# Altium PCB STM32_PCB1.PcbDoc
Units mm, origin at the board's own origin, x right, y up, seen from the top; angles counter-clockwise.
Board outline 41 x 41.1 mm, 4 copper layers (L1(Signal), L2(GND), L3(GND), L4(Signal)), stack 1.57 mm thick; 35 components, 27 nets, 172 pads, 67 vias.
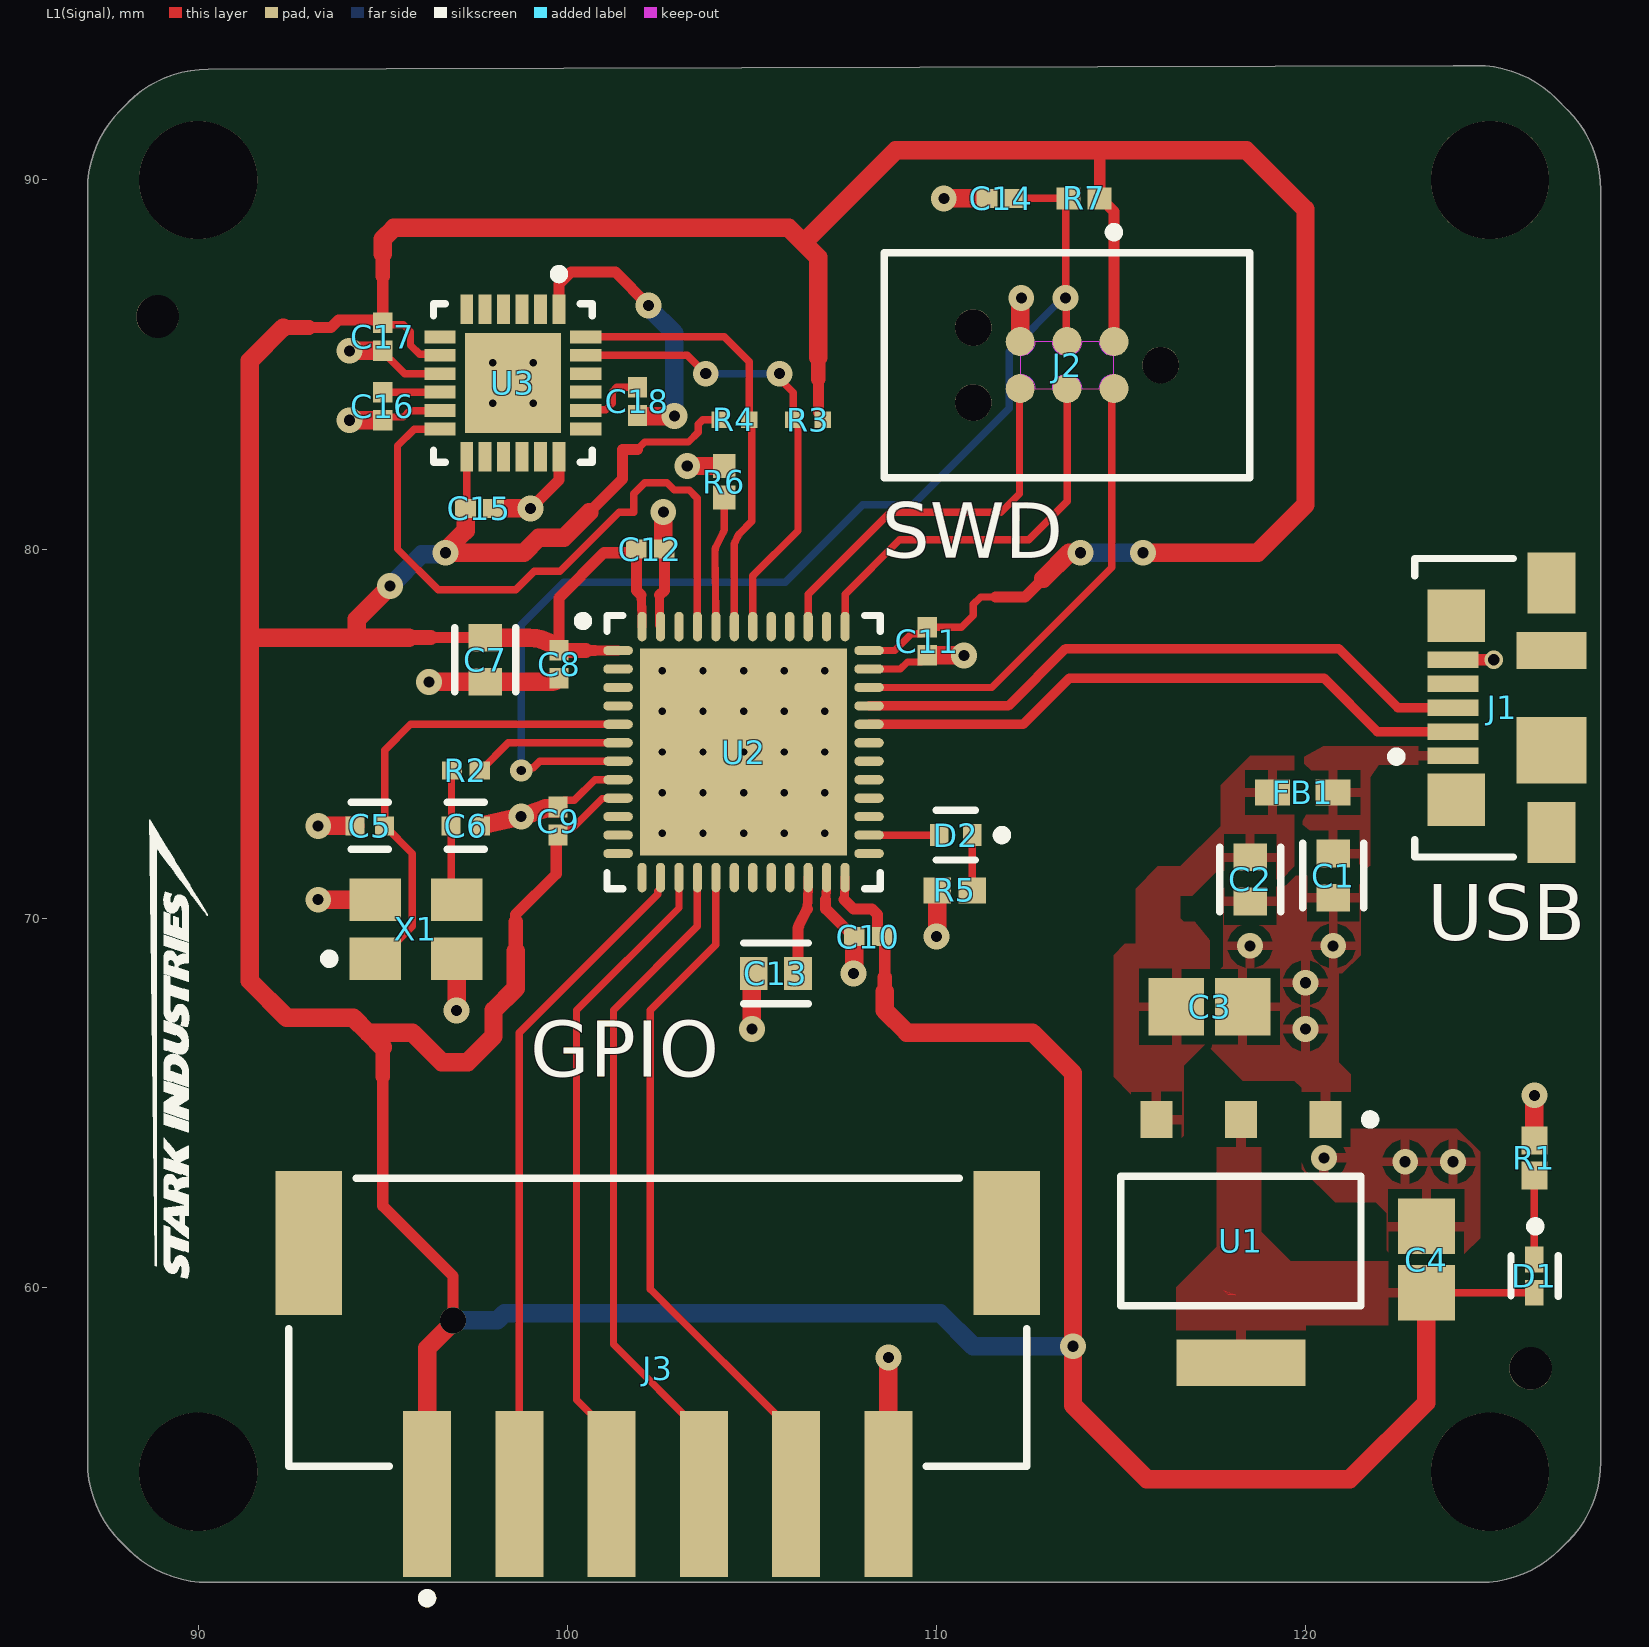
[diagram p0: L1(Signal) view]
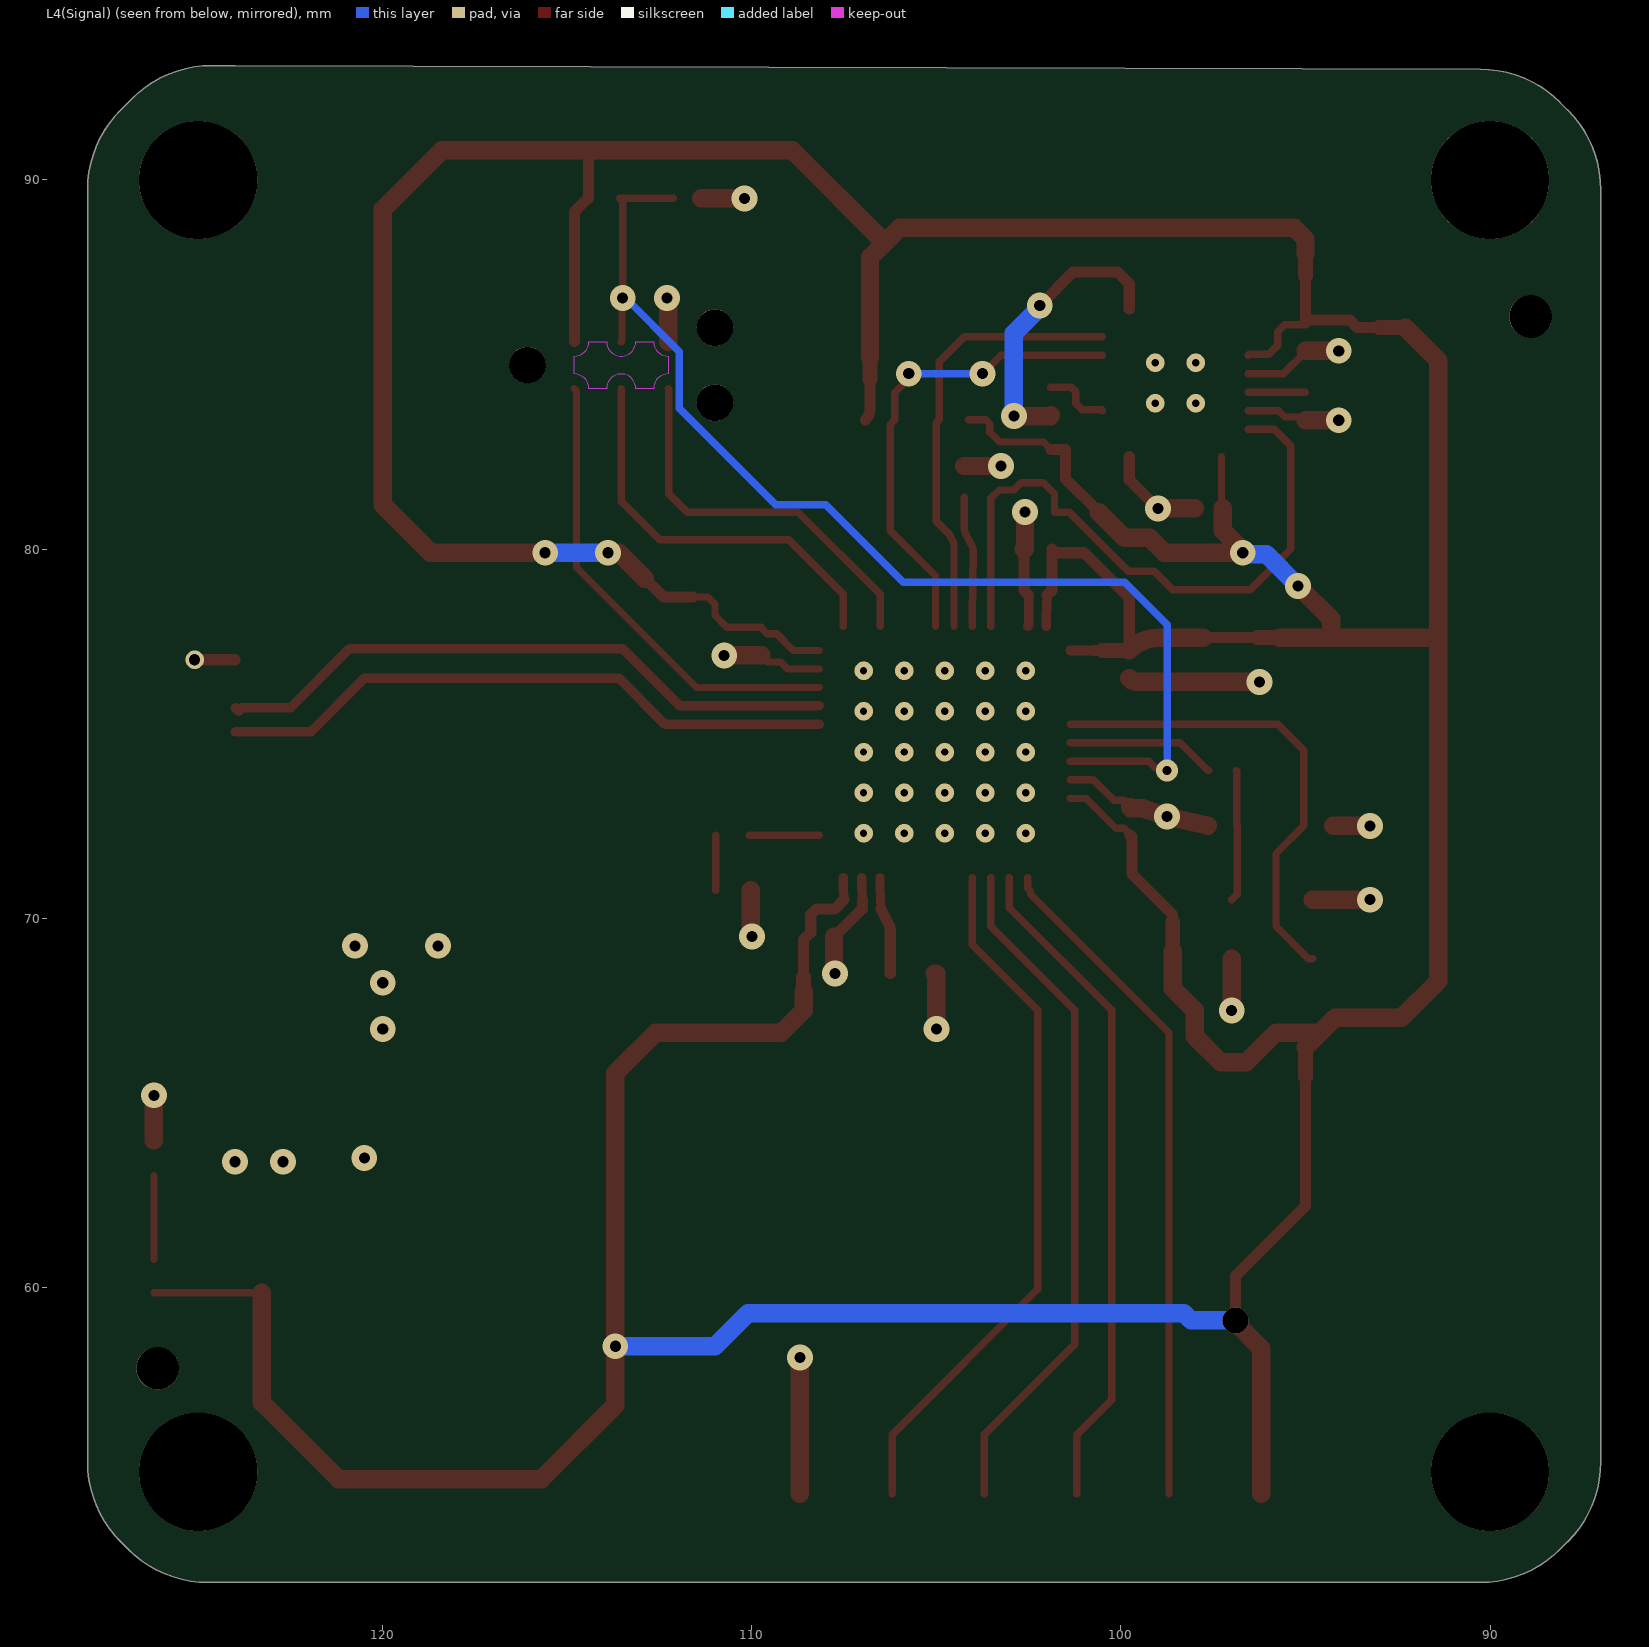
[diagram p1: L4(Signal) view, seen from below]
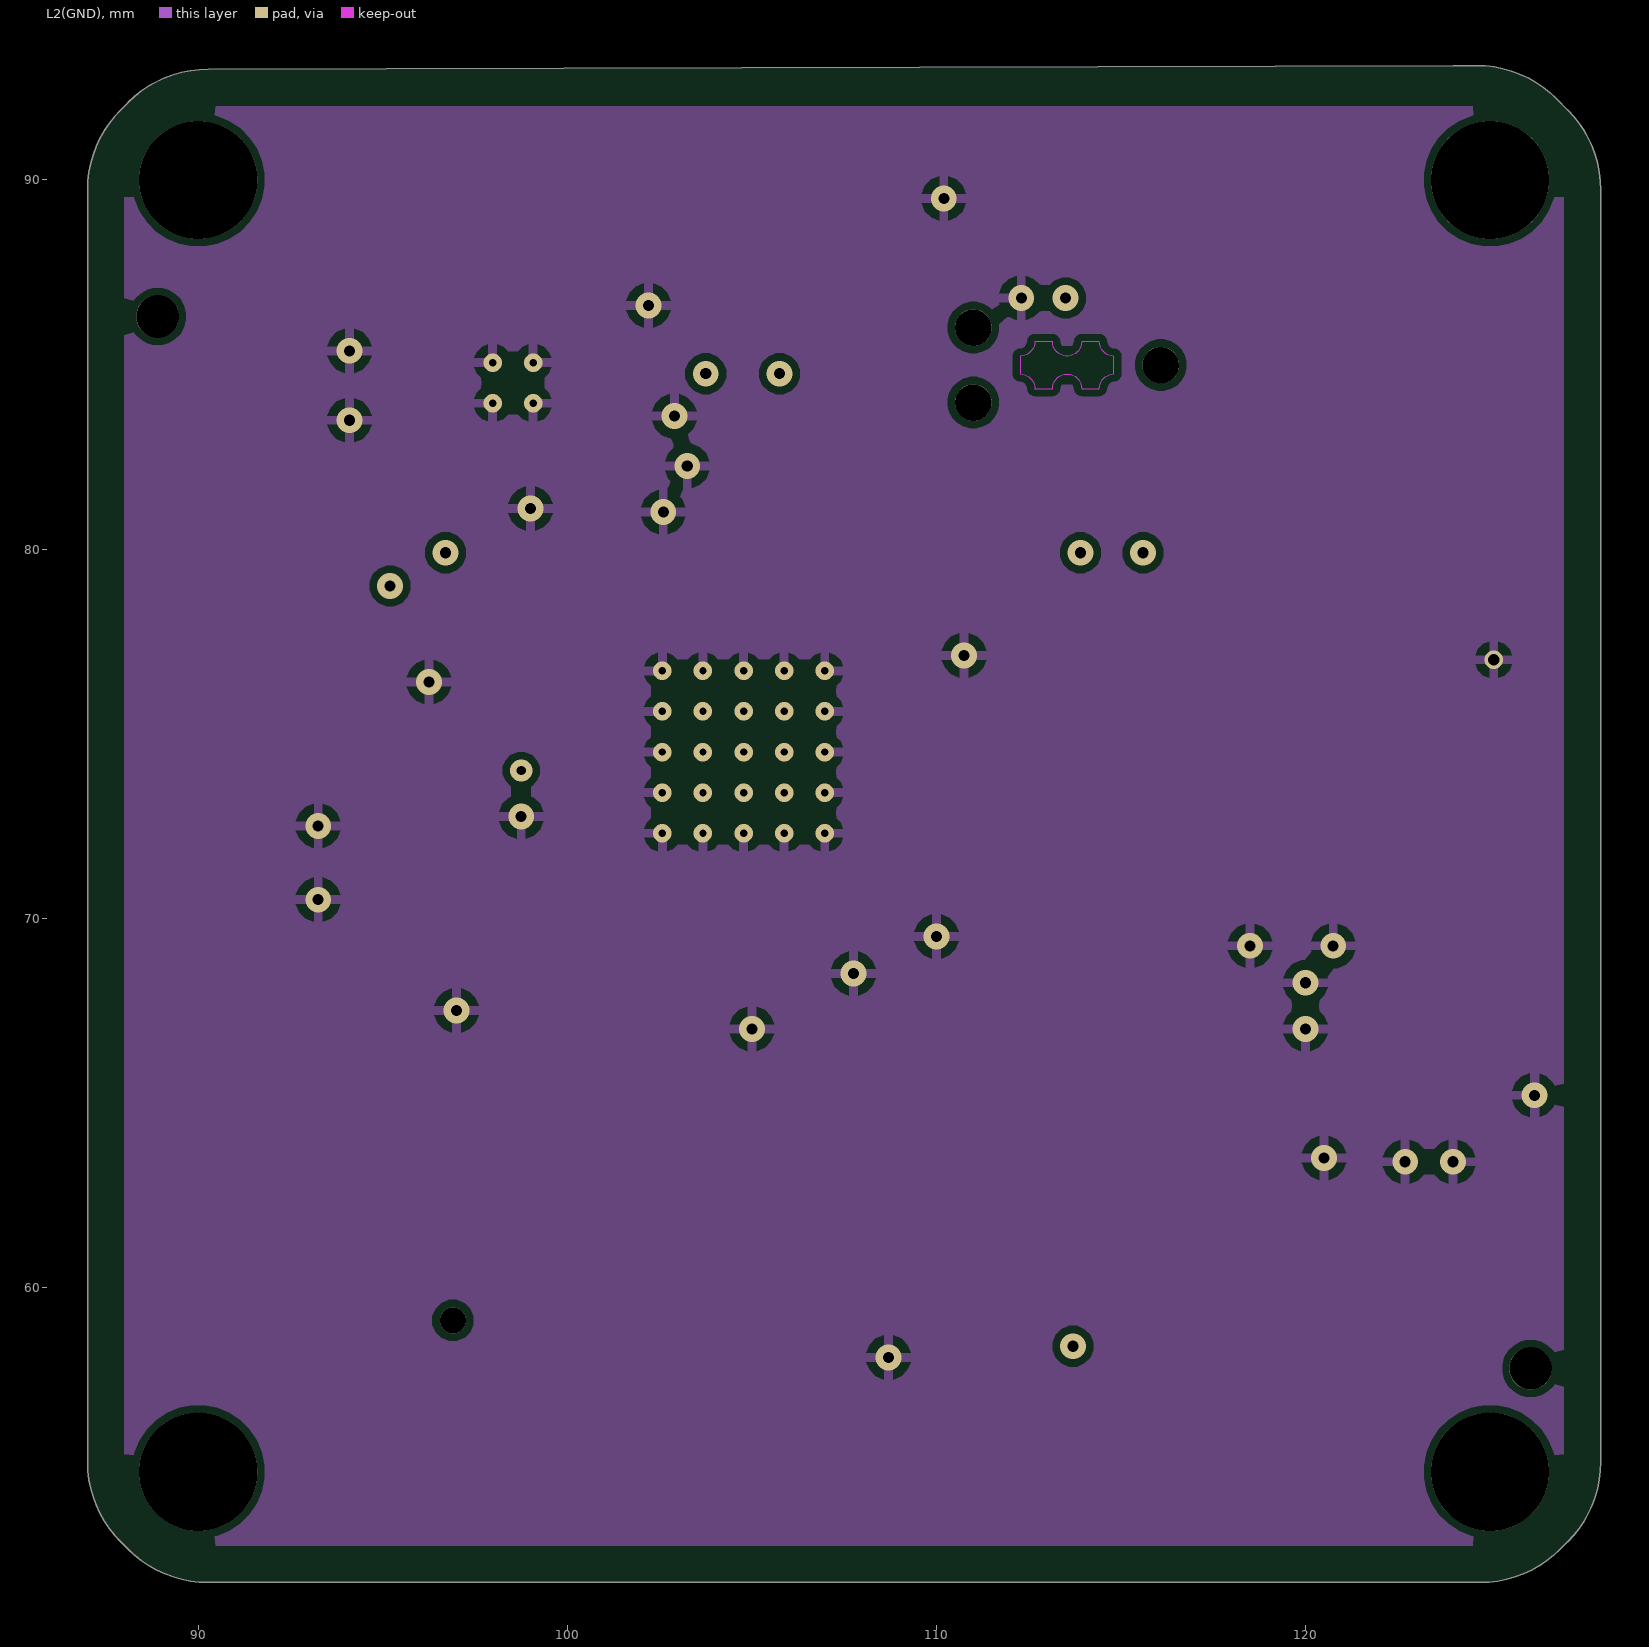
[diagram p2: L2(GND)]
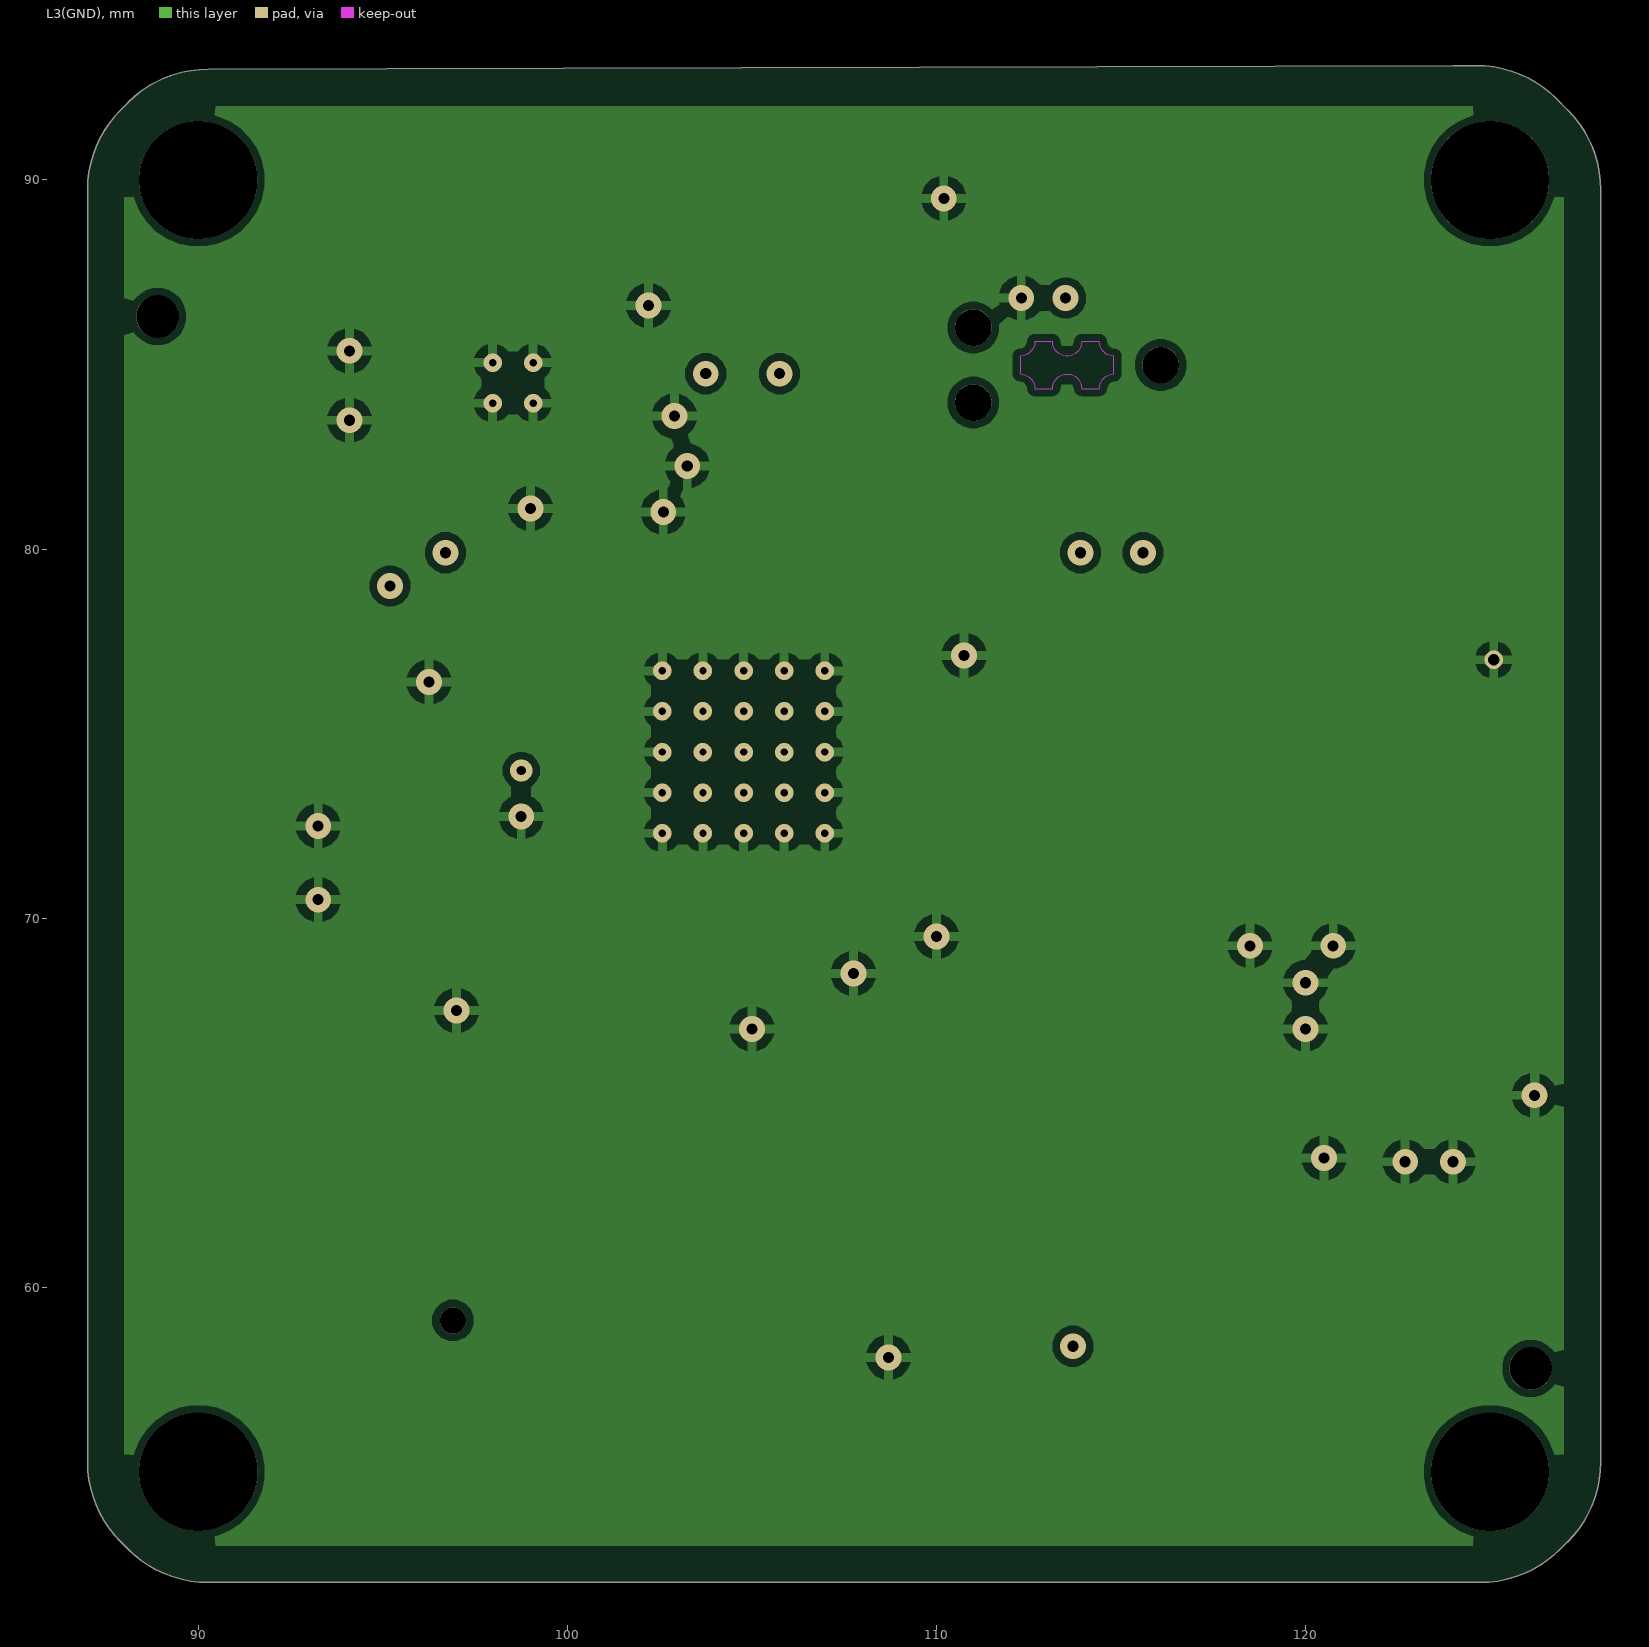
[diagram p3: L3(GND)]

## Layer stack, top to bottom
Top Solder: solder mask 0.0254, SM-001, Dk 4
L1(Signal): signal copper 0.035
Dielectric 1: prepreg 0.2, PP-017, Dk 4.6
L2(GND): signal copper 0.0175
Dielectric 3: core 1.065, Core-039, Dk 4.6
L3(GND): signal copper 0.0175
Dielectric 5: prepreg 0.2, PP-017, Dk 4.6
L4(Signal): signal copper 0.035
Bottom Solder: solder mask 0.0254, SM-001, Dk 4

## Board outline
87.898,53.102 cw(c90.066,55.27) 87,55.27 87,56 87,88 87,89.73 cw(c90.066,89.73) 87.898,91.898 88.102,92.102 cw(c90.27,89.934) 90.27,93 124,93.1 124.63,93.1 cw(c124.63,90.034) 126.798,92.202 127.102,91.898 cw(c124.934,89.73) 128,89.73 128,55.27 cw(c124.934,55.27) 127.102,53.102 126.898,52.898 cw(c124.73,55.066) 124.73,52 90.27,52 cw(c90.27,55.066) 88.102,52.898

## Design rules (kind name [scope] priority, off if disabled: settings)
Clearance [All] p1: gap=0.2 ignorepadtopadclearanceinfootprint=FALSE
DiffPairsRouting [All] p1: maxlimit=0.254 minlimit=0.203 mostfreqgap=0.254 toplayer_maxgap=0.203 toplayer_prefgap=0.203 toplayer_minwidth=0.26 toplayer_maxwidth=0.26 toplayer_prefwidth=0.26 bottomlayer_maxgap=0.203 bottomlayer_prefgap=0.203 bottomlayer_minwidth=0.26 bottomlayer_maxwidth=0.26 bottomlayer_prefwidth=0.26 impedanceprofiledriven=TRUE impedanceprofileid={B0877188-79C3-4CE7-93F6-CE359E386961} impedanceprofilevalue=90.000000 maxuncoupledlength=12.7
PolygonConnect [All] p1: connectstyle=Relief reliefconductorwidth=0.254 reliefentries=4 polygonreliefangle="90 Angle" airgapwidth=0.254
RoutingVias [All] p1: holewidth=0.3 width=0.7 viastyle="Through Hole" minholewidth=0.25 minwidth=0.55 maxholewidth=0.4 maxwidth=0.9
SolderMaskExpansion [All] p1: expansion=0.102 istentingtop=FALSE
SupplyNets "Schematic Supply Nets_3" [InNet('+5V')] p1: voltage=0.000
SupplyNets "Schematic Supply Nets_2" [InNet('VBUS')] p2: voltage=0.000
SupplyNets "Schematic Supply Nets_1" [InNet('GND')] p3: voltage=0.000
SupplyNets "Schematic Supply Nets" [InNet('+3.3V')] p4: voltage=0.000
Width [All] p1: maxlimit=1 minlimit=0.2 preferedwidth=0.3 midlayer1_minwidth=0.254 midlayer1_maxwidth=0.254 midlayer1_prefwidth=0.254 midlayer2_minwidth=0.254 midlayer2_maxwidth=0.254 midlayer2_prefwidth=0.254 minimp=50.000000 maximp=50.000000 favimp=50.000000
29 further rules are at their usual default settings.

## Classes and differential pairs
differential pair class DIFF_USB: USB_D
differential pair USB_D: +USB_D_P -USB_D_N

## Components (designator, comment, footprint, x,y, rotation, side; value= is the part's Value field where it differs from the comment)
C1 "2.2u" FP-C0603C225K4PACTU-MFG 120.75,71.15 r270 top
C2 "2.2u" FP-C0603C225K4PACTU-MFG 118.5,71.05 r270 top
C3 "22u" CAPC2013X140X50ML20T25 117.4,67.6 r180 top
C4 "22u" CAPC2013X140X50ML20T25 123.275,60.75 r270 top
C5 "10p" FP-C0402-BB-MFG 94.65,72.5 r180 top value="10 pF"
C6 "10p" FP-C0402-BB-MFG 97.25,72.5 r0 top value="10 pF"
C7 "2.2u" FP-C0603C225K4PACTU-MFG 97.775,77 r270 top
C8 "100n" CAPC1005X55X30LL05T10 99.775,76.88 r90 top
C9 "100n" CAPC1005X55X30LL05T10 99.75,72.63 r270 top
C10 "100n" CAPC1005X55X30LL05T10 108.155,69.5 r0 top
C11 "100n" CAPC1005X55X30LL05T10 109.75,77.5 r90 top
C12 "100n" CAPC1005X55X30LL05T10 102.25,80 r180 top
C13 "2.2u" FP-C0603C225K4PACTU-MFG 105.65,68.5 r180 top
C14 "100n" CAPC1005X55X30LL05T10 111.75,89.5 r0 top
C15 "100n" CAPC1005X55X30LL05T10 97.62,81.1 r180 top
C16 "100n" CAPC1005X55X30LL05T10 95,83.87 r90 top
C17 "10n" CAPC1005X55X30LL05T10 95,85.75 r90 top
C18 "2n2" CAPC1005X55X30LL05T10 101.9,84 r90 top
D1 "LED_GREEN" FP-APHHS1005CGCK-MFG 126.2,60.3 r270 top
D2 "RED" FP-SML-P11UTT86-MFG 110.525,72.25 r180 top
FB1 "742792625" WE-CBF_0603_L1.6W0.8H0.8_HC 119.925,73.4 r180 top
J1 "473460001" FP-473460001-MFG 126.31,75.7 r90 top
J2 "TC2030-CTX-NL" FP-TC2030-CTX-NL-MFG 113.54,84.984 r180 top
J3 "S6B-XH-SM4-TB(LF)(SN)" FP-S6B-XH-SM4-TB_LF_SN-MFG 102.45,59.05 r180 top
R1 "1k" RESC1005X40X25ML10T10 126.2,63.5 r270 top
R2 "0R" RESC1005X40X25LL10T10 97.25,74 r0 top
R3 "2.2k" RESC1005X40X25LL05T05 106.525,83.5 r0 top
R4 "2.2k" RESC1005X40X25LL05T05 104.525,83.5 r180 top
R5 "1k" RESC1005X40X25ML10T10 110.5,70.75 r0 top
R6 "10k" RESC1005X40X25NL10T10 104.25,81.825 r270 top
R7 "10k" RESC1005X40X25NL10T10 114,89.5 r0 top
U1 "AMS1117-3.3" FP-AMS1117-IPC_C 118.25,61.25 r270 top
U2 "STM32F411CEU6" STM-UFQFPN48_L 104.775,74.5 r0 top
U3 "MPU-6050" IS-QFN-24_V 98.525,84.5 r270 top
X1 "24Mhz" EPSON-TSX-3225_V 95.9,69.7 r0 top

## Footprints (in the part's own frame and the unit in brackets; to place one, negate y for a bottom-side part, rotate by r counter-clockwise, add the part's x,y. Pads: shape width x height; smd on the part's side, far side on the other; paste and mask are expansions set on the pad)
CAPC1005X55X30LL05T10 [mm] "Chip Capacitor, 2-Leads, Body 1.00x0.50mm, IPC High Density"
  rect 0.56x0.52 smd: 1(-0.38,0) 2(0.38,0)
  body extent -0.53,-0.28 0.53,0.28, height 0.55
CAPC2013X140X50ML20T25 [mm] "Chip Capacitor, 2-Leads, Body 2.00x1.25mm, IPC Low Density"
  rect 1.5x1.55 smd: 1(-0.9,0) 2(0.9,0)
  body extent -1.1,-0.72 1.1,0.72, height 1.4
EPSON-TSX-3225_V [mm] "SMD, 4-Leads, Body 3.2x2.5mm"
  rect 1.4x1.15 smd: 1(-1.1,-0.8) 2(1.1,-0.8) 3(1.1,0.8) 4(-1.1,0.8)
  silkscreen extent -2.47,-0.92 -2.22,-0.68, body extent -1.6,-1.25 1.6,1.25, height 0.6
FP-473460001-MFG [mm]
  rect 0.45x1.38 smd paste+0 mask+0: 1(-1.3,2.31) 2(-0.65,2.31) 3(0,2.31) 4(0.65,2.31) 5(1.3,2.31)
  rect 1.425x1.55 smd paste+0 mask+0: 6(-2.488,2.225) 7(2.488,2.225)
  rect 1.65x1.3 smd paste+0 mask+0: 8(-3.375,-0.35) 11(3.375,-0.35)
  rect 1.8x1.9 smd paste+0 mask+0: 9(-1.15,-0.35)
  rect 1x1.9 smd paste+0 mask+0: 10(1.55,-0.35)
  silkscreen extent -4.05,0.67 4.05,3.97, body extent -4.3,-2.48 4.3,3.45, height 0.25
FP-AMS1117-IPC_C [mm]
  rect 1.004x0.872 smd paste+0 mask+0: 1(-3.295,2.29) 2(-3.295,0) 3(-3.295,-2.29)
  rect 1.25x3.5 smd paste+0 mask+0: 4(3.295,0)
  silkscreen extent -3.42,-3.25 1.75,3.63, body extent -3.9,-3.35 3.9,3.35, height 0.25
FP-APHHS1005CGCK-MFG [mm]
  rect 0.7x0.5 smd paste+0 mask+0: 1(-0.45,0) 2(0.45,0)
  silkscreen extent -1.47,-0.63 0.55,0.65, body extent -0.9,-0.4 0.9,0.4, height 0.25
FP-C0402-BB-MFG [mm]
  rect 0.52x0.52 smd paste+0 mask+0: 1(-0.4,0) 2(0.4,0)
  silkscreen extent -0.5,-0.64 0.5,0.64, body extent -0.8,-0.4 0.8,0.4, height 0.25
FP-C0603C225K4PACTU-MFG [mm]
  rect 0.75x0.9 smd paste+0 mask+0: 1(-0.6,0) 2(0.6,0)
  silkscreen extent -0.87,-0.82 0.87,0.82, body extent -1.2,-0.6 1.2,0.6, height 0.25
FP-S6B-XH-SM4-TB_LF_SN-MFG [mm]
  rect 1.3x4.5 smd paste+0 mask+0: 1(6.25,4.65) 2(3.75,4.65) 3(1.25,4.65) 4(-1.25,4.65) 5(-3.75,4.65) 6(-6.25,4.65)
  rect 1.8x3.9 smd paste+0 mask+0: 7(-9.45,-2.15) 8(9.45,-2.15)
  silkscreen extent -10,-3.9 10,7.6, body extent -9.97,-6.1 9.97,3.9, height 6
FP-SML-P11UTT86-MFG [mm]
  rect 0.5x0.6 smd paste+0 mask+0: 1(-0.45,0) 2(0.45,0)
  silkscreen extent -1.38,-0.67 0.53,0.67, body extent -0.8,-0.43 0.8,0.43, height 0.25
FP-TC2030-CTX-NL-MFG [mil]
  round 30.98 smd paste-39370.1 mask+0: 1(-50,-25) 2(-50,25) 3(0,-25) 4(0,25) 5(50,-25) 6(50,25)
  round 39.02 hole 39.02 unplated paste-99999 mask+0: ""(-100,0) ""(100,-40) ""(100,40)
  Keep-Out Layer region: -34.51,-25 -15.49,-25 -13.96,-18.28 -9.66,-12.89 -3.45,-9.9 3.45,-9.9 9.66,-12.89 13.96,-18.28 15.49,-25 15.49,-25 34.51,-25 35.69,-19.07 39.05,-14.05 44.07,-10.69 50,-9.51 50,-9.51 50,9.51 44.07,10.69 39.05,14.05 35.69,19.07 34.51,25 34.51,25 15.49,25 13.96,18.28 9.66,12.89 3.45,9.9 -3.45,9.9 -9.66,12.89 -13.96,18.28 -15.49,25 -15.49,25 -34.51,25 -35.69,19.07 -39.05,14.05 -44.07,10.69 -50,9.51 -50,9.51 -50,-9.51 -44.07,-10.69 -39.05,-14.05 -35.69,-19.07 -34.51,-25
  silkscreen extent -195,-147 195,120, body extent -199,-124 199,124, height 10
IS-QFN-24_V [mm] "QFN, 24-Leads, Body 4x4mm, Pitch 0.5mm, Thermal Pad 2.7x2.6mm"
  rect 0.8x0.35 smd: 1(-2,1.25) 2(-2,0.75) 3(-2,0.25) 4(-2,-0.25) 5(-2,-0.75) 6(-2,-1.25) 13(2,-1.25) 14(2,-0.75) 15(2,-0.25) 16(2,0.25) 17(2,0.75) 18(2,1.25)
  rect 0.35x0.85 smd mask+0.102: 7(-1.25,-1.975) 8(-0.75,-1.975) 9(-0.25,-1.975) 10(0.25,-1.975) 11(0.75,-1.975) 12(1.25,-1.975) 19(1.25,1.975) 20(0.75,1.975) 21(0.25,1.975) 22(-0.25,1.975) 23(-0.75,1.975) 24(-1.25,1.975)
  rect 2.7x2.6 smd: 25(0,0)
  silkscreen extent -3.07,-2.15 2.15,2.15, body extent -2,-2 2,2, height 0.95
RESC1005X40X25LL05T05 [mm] "Chip Resistor, 2-Leads, Body 1.00x0.50mm, IPC High Density"
  rect 0.45x0.45 smd: 1(-0.4,0) 2(0.4,0)
  body extent -0.53,-0.27 0.53,0.28, height 0.4
RESC1005X40X25LL10T10 [mm] "Chip Resistor, 2-Leads, Body 1.00x0.50mm, IPC High Density"
  rect 0.55x0.5 smd: 1(-0.375,0) 2(0.375,0)
  body extent -0.55,-0.3 0.55,0.3, height 0.4
RESC1005X40X25ML10T10 [mm] "Chip Resistor, 2-Leads, Body 1.00x0.50mm, IPC Low Density"
  rect 0.75x0.7 smd: 1(-0.475,0) 2(0.475,0)
  body extent -0.55,-0.3 0.55,0.3, height 0.4
RESC1005X40X25NL10T10 [mm] "Chip Resistor, 2-Leads, Body 1.00x0.50mm, IPC Medium Density"
  rect 0.65x0.6 smd: 1(-0.425,0) 2(0.425,0)
  body extent -0.55,-0.3 0.55,0.3, height 0.4
STM-UFQFPN48_L [mm] "QFN, 48-Leads, Body 7.1x7.1mm, Pitch 0.5mm, Thermal Pad 5.6x5.6mm, IPC High Density"
  oval 0.8x0.25 smd: 1(-3.4,2.75) 2(-3.4,2.25) 3(-3.4,1.75) 4(-3.4,1.25) 5(-3.4,0.75) 6(-3.4,0.25) 7(-3.4,-0.25) 8(-3.4,-0.75) 9(-3.4,-1.25) 10(-3.4,-1.75) 11(-3.4,-2.25) 12(-3.4,-2.75) 25(3.4,-2.75) 26(3.4,-2.25) 27(3.4,-1.75) 28(3.4,-1.25) 29(3.4,-0.75) 30(3.4,-0.25) 31(3.4,0.25) 32(3.4,0.75) 33(3.4,1.25) 34(3.4,1.75) 35(3.4,2.25) 36(3.4,2.75)
  oval 0.25x0.8 smd: 13(-2.75,-3.4) 14(-2.25,-3.4) 15(-1.75,-3.4) 16(-1.25,-3.4) 17(-0.75,-3.4) 18(-0.25,-3.4) 19(0.25,-3.4) 20(0.75,-3.4) 21(1.25,-3.4) 22(1.75,-3.4) 23(2.25,-3.4) 24(2.75,-3.4) 37(2.75,3.4) 38(2.25,3.4) 39(1.75,3.4) 40(1.25,3.4) 41(0.75,3.4) 42(0.25,3.4) 43(-0.25,3.4) 44(-0.75,3.4) 45(-1.25,3.4) 46(-1.75,3.4) 47(-2.25,3.4) 48(-2.75,3.4)
  rect 5.6x5.6 smd: 49(0,0)
  silkscreen extent -4.47,-3.7 3.7,3.7, body extent -3.55,-3.55 3.55,3.55, height 0.6
WE-CBF_0603_L1.6W0.8H0.8_HC [mm] "SMD EMI Suppression Ferrite  Bead, body 1.60x0.80mm"
  rect 0.95x0.7 smd: 1(-0.825,0) 2(0.825,0)
  body extent -0.8,-0.4 0.8,0.4, height 0.8

## Part data
C1 C2 C7 C13: library part CMP-2006-02259-2, "CAP CER 2.2UF 16V X5R 0603", Capacitance=2.2uF, Case Code (Imperial)=0603, Case Code (Metric)=1608, Dielectric=X5R, Dielectric Material=Ceramic, Max Operating Temperature=85°C, Min Operating Temperature=-55°C, Package Quantity=1, Tolerance=10%, Voltage=16V, Case/Package=0603, Construction=Flat, Contact Plating=Tin, Depth=0.8mm, Dissipation Factor=5%, Height=0.8mm, Lead Free="Lead Free", Length=1.6mm, Mount="Surface Mount", Number of Pins=2, Packaging="Tape and Reel", Radiation Hardening=No, REACH SVHC="No SVHC", RoHS Compliant=Yes, Series=C, Termination=SMD/SMT, Thickness=0.034inch, Voltage Rating=16V, Voltage Rating (DC)=16V, Width=0.8mm
C3 C4: library part CMP-2007-03313-1, Manufacturer=Kemet, Part Number=C0805X225K4RACTU
C5 C6: library part CMP-2008-03443-2, "CAP CER 10PF 16V 10% NP0 0402", Capacitance="10 pF", Manufacturer=Kemet, Manufacturer Part Number=C0402C100K4GACTU, Package=C0402-BB, Temperature="-55°C to +125°C", Temperature Characteristic=C0G, Temperature Coefficient=15%, Temperature Range High=+125°C, Temperature Range Low=-55°C, Tolerance=0.1, Voltage Rating="16 V", Automotive=No, Category=Cap, ComponentLink2Description=Datasheet, ComponentLink2URL=https://content.kemet.com/datasheets/KEM_C1002_X7R_SMD.pdf, Device Class L1="Passive Components", Device Class L2=Capacitors, Device Class L3="Ceramic Capacitors", Digikey Description="CAP CER 10PF 16V 10% NP0 0402", Height=0.55mm, Ipc Land Pattern Name=CAPC10050X50, Lead Free=Yes, Material=Ceramic, Mouser Description="Multilayer Ceramic Capacitors MLCC - SMD/SMT 16volts 10pF C0G 10%", Octopart=https://octopart.com/c0402c100k4gactu-kemet-12569135, RoHS=TRUE
C8 C9 C10 C11 C12 C14 C15 C16 C17 C18: library part CMP-0001-00074-2, Manufacturer=Kemet, Part Number=C0402C104K4RACTU
D1: library part CMP-44529-000044-1, "LED GREEN CLEAR CHIP SMD", Case Code (Imperial)=0402, Case Code (Metric)=1005, Color=Green, Forward Current=20mA, Forward Voltage=2.1V, Lens Color=Clear, Max Operating Temperature=85°C, Min Operating Temperature=-40°C, Package Quantity=2000, Case/Package=0402, Dominant Wavelength=570nm, Height=0.6mm, Illumination Color=Green, Lead Free="Lead Free", Length=1mm, Lens Style=Clear, Luminous Intensity=50mcd, Mount="Surface Mount", Number of LEDs=1, Number of Pins=2, Packaging="Tape and Reel", Test Current=20mA, Viewing Angle=120°, Wavelength=570nm, Width=0.5mm
D2: library part CMP-08952-000028-1, "LED RED CLEAR 1006 SMD", Case Code (Imperial)=0402, Case Code (Metric)=1005, Color=Red, Forward Current=20mA, Forward Voltage=1.8V, Lens Color=Colorless, Max Operating Temperature=85°C, Min Operating Temperature=-40°C, Package Quantity=1, Test Current=1mA, Case/Package=0402, Dominant Wavelength=621nm, Height=0.25mm, Illumination Color=Red, Lead Free="Lead Free", Length=1mm, Lens Style=Square, Lens Transparency=Clear, Luminous Intensity=5.5mcd, Mount="Surface Mount", Number of LEDs=1, Number of Pins=2, Packaging="Tape and Reel", Radiation Hardening=No, REACH SVHC="No SVHC", RoHS Compliant=Yes, Series=PicoLED™, Viewing Angle=150°, Wavelength=621nm, Width=0.6mm
FB1: library part CMP-0220-00174-3, Case Code (Imperial)=0603, Case Code (Metric)=1608, Current Rating=1.5A, DC Resistance (DCR)=50mΩ, Max Current Rating=2A, Max Operating Temperature=125°C, Min Operating Temperature=-55°C, Test Frequency=400MHz, Tolerance=25%, Case/Package=0603, Core Material=Ferrite, Depth=800µm, Height=800µm, Impedance=120Ω, Length=1.6mm, Material=Ferrite, Max DC Current=2A, Mount="Surface Mount", NexarPartId=30515504, Number of Lines=1, Packaging=Digi-Reel®, RMS Current (Irms)=2A, RoHS=Compliant, Series Resistance=50mΩ, Termination=SMD/SMT, Weight=2.012816mg, Width=800µm
J1: library part CMP-2000-05246-2, "CONN RCPT USB2.0 MICRO B SMD R/A", Current Rating=1.8A, Manufacturer=Molex, Package=0, Temperature="-30°C to +85°C", Temperature Range High=+85°C, Temperature Range Low=-30°C, Voltage Rating=30V, Automotive=No, Category=Conn, ComponentLink2Description=Datasheet, ComponentLink2URL=https://www.molex.com/webdocs/datasheets/pdf/en-us/0473460001_IO_CONNECTORS.pdf, Conn Orientation="Right Angle", Contact Material=Gold,Nickel, Device Class L1=Connectors, Device Class L2="USB Connectors", Device Class L3=unset, Digikey Description="CONN RCPT USB2.0 MICRO B SMD R/A", Footprint Url=https://www.molex.com/pdm_docs/sd/473460001_sd.pdf, Height=2.945mm, Is Female=yes, Lead Free=Yes, Manufacturer Part Number=473460001, Number Of Contacts=5, Octopart=https://octopart.com/47346-0001-molex-7164928, Pitch=0.65mm, RoHS=TRUE, Shielding=true, Usb Standard="USB 2.0"
J2: library part CMP-205963-000001-1, "6-Pin “No legs” TC2030 Plug-of-Nails™ Cable for use with ARM Cortex processors"
J3: library part CMP-17439-000164-1, "CONN HEADER SMD R/A 6POS 2.5MM", Color=Natural, Contact Resistance=20mR, Flammability Rating="UL94 V-0", Housing Color=Beige, Max Current Rating=3A, Max Operating Temperature=85°C, Max Voltage Rating (AC)=250V, Min Operating Temperature=-25°C, Package Quantity=1, Connector Type=Header, Contact Finish - Mating=TIN, Contact Material="Copper Alloy", Contact Plating=Copper, Contact Shape=Square, Contact Type="Male Pin", Depth=7mm, Fastening Type=Detent, Gender=Male, Housing Material=Polyamide, Insulation Color=Natural, Insulation Material=Nylon, Lead Free="Lead Free", Length=20mm, Mount="Surface Mount", Number Of Contacts=6, Number of Positions=6, Number of Rows=1, Orientation="Right Angle", Packaging="Tape and Reel", Pitch=2.5mm, REACH SVHC="No SVHC", Series=XH, Termination=Solder, Voltage Rating=250V
R1 R5: library part CMP-2002-04691-1, Manufacturer=Bourns, Part Number=CR0402-FX-1001G
R2: library part CMP-2002-04690-1, Manufacturer=Bourns, Part Number=CR0402-FX-1000GLF
R3 R4: library part CMP-2002-00488-1, Manufacturer=Panasonic, Part Number=ERJ-2GEJ222X
R6 R7: library part CMP-2002-04694-1, Manufacturer=Bourns, Part Number=CR0402-FX-1002GLF
U1: library part CMP-209535-000001-1, "LDO Voltage Regulators 1A, 3.3V", Dropout Voltage=1.1V, Manufacturer="Advanced Monolithic Systems", Max Junction Temp=+125°C, Max Power Dissipation=1.2W, Max Supply Voltage=15V, Nominal Supply Current=5mA, Output Current=1A, Output Voltage=3.3V, Package=AMS1117, Temperature="-40°C to +125°C", Temperature Range Low=-40°C, Automotive=No, Category=IC, ComponentLink2Description=Datasheet, ComponentLink2URL=http://www.advanced-monolithic.com/pdf/ds1117.pdf, Device Class L1="Integrated Circuits (ICs)", Device Class L2="Power Management ICs", Device Class L3="Voltage Regulators - Linear", Height=1.8mm, Ipc Land Pattern Name=SOT229P700X180-4, Lead Free=Yes, Manufacturer Part Number=AMS1117-3.3, Number Of Outputs=1, Octopart=https://octopart.com/ams1117-3.3-advanced+monolithic+systems-25899300, Output Type=Fixed, RoHS=TRUE, Standoff Height=0.64mm, Temperature Range High=+125°C
U2: library part CMP-0243-00165-1, "ARM Cortex-M4 32-bit MCU+FPU, 512 KB Flash, 128 KB RAM, 36 I/Os, 48-Pin UFQFPN, -40 to 85 degC, Tray", I/Os (High Current)=36, Operating Frequency(F) (Processor speed) (MHz)=100, Package Description=UFQFPN48, Package Reference="48-Pin Ultra Thin Fine Pitch Quad Flat No-Lead, 7 x 7 x 0.6 mm Body, 0.5 mm Pitch, Exposed Pad", Supply Voltage(Vcc) min (V)=1.7, ComponentLink1Description="Manufacturer URL", ComponentLink1URL=http://www.st.com/, ComponentLink2Description=Datasheet, ComponentLink2URL=http://www.st.com/st-web-ui/static/active/en/resource/technical/document/datasheet/DM00115249.pdf, Core="ARM Cortex-M4", DatasheetVersion="Rev. 6", FLASH Size (Prog) (kB)=512, Internal RAM Size (kB)=128, Mounting Technology="Surface Mount", Packing=Tray
U3: library part CMP-1753-00002-2, "3-Axis Gyroscope, Accelerometer and a Digital Motion Processor(TM) (DMP), 2.375 to 3.46 V, -40 to 85 degC, 24-Pin QFN, RoHS, Tape and Reel", Manufacturer=InvenSense, Standard Package=5,000, Category=Sensors,Transducers, Datasheet URL=http://datasheet.octopart.com/MPU-6050-InvenSense-datasheet-14421344.pdf, Datasheet Version="Rev. 3.3, 05/2012", Dynamic Catalog=MPU-6000™Series, Family=Multifunction, Featured Product=MPU-60506-Axis,IntegratedI²CSolution, Manufacturer URL=http://www.invensense.com/, Online Catalog=MPU-6000™Series, Other Names="1428-1007-2 / MPU6050", Output Type=Digital, Sensor Type=MotionTracking, Unit PriceUSD=Digital
X1: library part CMP-2000-07333-1, "MHz Range Crystal, 24 MHz, -40 to 85 degC, 4-Pin SMD, RoHS, Tape and Reel", Frequency=24MHz, Frequency Stability=10PPM, Load Capacitance=9pF, Manufacturer=Epson, Operating Temperature Range=-40Cto+85C, Package / Case=3.2mmx2.5mm, Package Description="4-Pin Surface Mount Device, Body 3.2 x 2.5 mm", Package Reference=TSX-3225, Brand=EpsonTiming, Datasheet URL=https://support.epson.biz/td/api/doc_check.php?dl=brief_FA-238V_en.pdf, Datasheet Version=12/2015, Drive Level=200uW, ESR=40Ohms, Factory Pack Quantity=250, Height=0.6mm, Length=3.2mm, Manufacturer URL=https://www.eea.epson.com/, Mounting Style=SMD/SMT, Mounting Technology=SurfaceMount, Packaging=Reel, Product Category=Crystals, RoHS=True, Series=TSX-3225, Termination Style=SMD/SMT, Tolerance=10PPM, Type=Crystal, Unit Weight=0.000564oz, Width=2.5mm

## Free pads (board coordinates)
  round 3.2 hole 3.2: 1(90,55) 1(90,90) 1(125,55) 1(125,90)
  round 1.152 hole 1.152: TH(88.9,86.3) TH(126.1,57.8)

## Via types
v1: diameter 0.7, hole 0.3, L1(Signal) to L4(Signal), 35 vias
v2: diameter 0.5, hole 0.2, L1(Signal) to L4(Signal), 29 vias
v3: diameter 0.5, hole 0.3, L1(Signal) to L4(Signal), 1 vias
v4: diameter 0.711, hole 0.711, L1(Signal) to L4(Signal), 1 vias
v5: diameter 0.6, hole 0.25, L1(Signal) to L4(Signal), 1 vias

## Nets (pads, with @x,y where several pads share a name; then routed paths per layer and width w, separated by ;. In a path a pad name is that pad's centre, name@x,y a point inside that pad or via, vN(x,y) a via of type N, cw(c..) or ccw(c..) an arc to the next point about the centre after c; other vN are vias at no path point)
+3.3V: C4.2 C7.1 C8.2 C9.2 C10.2 C11.2 C12.2 C15.2 C17.2 D1.2 J2.1 J3.1 R3.2 R4.2 R7.2 U1.2 U1.4 U2.1 U2.9 U2.24 U2.36 U2.48 U3.8 U3.13 | length 199.9
  L1(Signal) w0.2: C17.2 95.057,86.073 95.56,86.073 95.75,85.883 95.75,85.526 96.001,85.275 96.525,85.275 U3.8 ; C15.2 97.275,81.1 U3.13 ; C9.2 99.75,72.27 99.91,72.43 100.134,72.43 100.945,73.24 101.365,73.24 U2.9 ; 101.9,82.7 102.1,82.9 103.283,82.9 103.55,83.167 103.55,83.383 103.667,83.5 R4.2 ; U2.36 108.875,77.25 109.325,77.7 109.59,77.7 109.75,77.86 C11.2 110.68,77.88 111,78.2 111,78.5 111.2,78.7 111.6,78.7 ; C4.2 D1.2
  L1(Signal) w0.25: 102,78.75 102.025,78.175 U2.48 ; 107.5,70.5 107.525,70.825 U2.24
  L1(Signal) w0.26: 100.75,77.25 U2.1
  L1(Signal) w0.3: 93,86 93.6,86 93.8,86.2 94.93,86.2 C17.2 95,87.4 ; 95,65.7 95,62.2 96.9,60.3 v4(96.9,59.1) ; 96.3,77.6 C7.1 ; 98.6,69.9 98.6,70.1 99.7,71.2 99.7,72.2 C9.2 ; C8.2 99.775,78.675 101,79.9 101.77,79.9 C12.2 101.87,78.88 102,78.75 ; 100.5,77.25 100.75,77.25 ; 100.6,81 101.5,81.9 101.5,82.7 101.9,82.7 ; 106.8,84.6 106.8,83.802 ccw(c107.227,83.802) R3.2 ; 107.5,70.5 107.75,70.25 108.25,70.25 108.405,70.095 108.405,69.61 108.6,69.415 108.6,68.4 ; 111.6,78.7 112.4,78.7 112.9,79.2 ; 114.4,90.8 114.425,90.775 R7.2 114.45,89.5 114.81,89.14 J2.1
  L1(Signal) w0.4: 92.3,86 93,86 ; 95,65.7 95,66.5 ; 95,87.4 95,88 ; 95.7,77.6 96.3,77.6 ; 98.6,69.1 98.6,69.9 ; C8.2 ccw(c99.799,77.284) 99.799,77.25 100.5,77.25 ; 106.8,84.6 106.8,85.2 ; 108.6,68 108.6,68.4
  L1(Signal) w0.5: 92.3,86 91.4,85.1 91.4,77.6 ; 95,66.5 94.6,66.9 ; 95,88 95,88.4 95.3,88.7 106,88.7 106.4,88.3 ; v1(95.2,79) 94.3,78.1 94.3,77.6 ; 95.7,77.6 94.3,77.6 ; J3.1 96.2,58.343 96.9,59.043 v4(96.9,59.1) ; C15.2 97.245,81.095 97.245,80.499 96.7,79.954 v1(96.7,79.9) 98.822,79.9 99.222,80.3 99.9,80.3 100.6,81 ; C7.1 98.954,77.6 cw(c98.954,76.439) C8.2 ; 98.6,69.1 98.6,68.1 98,67.5 98,66.8 97.3,66.1 96.6,66.1 95.8,66.9 94.6,66.9 ; 106.8,85.2 106.8,87.9 106.4,88.3 ; 108.6,68 108.6,67.5 109.2,66.9 112.6,66.9 113.7,65.8 v1(113.7,58.4) 113.7,56.8 115.7,54.8 121.2,54.8 123.275,56.875 C4.2 ; 112.9,79.2 113.6,79.9 v1(113.9,79.9) ; v1(115.6,79.9) 118.7,79.9 120,81.2 120,89.2 118.4,90.8 114.4,90.8 108.9,90.8 106.4,88.3 ; 91.4,77.6 91.4,68.3 92.4,67.3 94.2,67.3 94.6,66.9 ; 91.4,77.6 94.3,77.6
  L4(Signal) w0.5: v1(95.2,79) 96.062,79.862 96.662,79.862 v1(96.7,79.9) ; v4(96.9,59.1) 98.1,59.1 98.3,59.3 110.1,59.3 111,58.4 v1(113.7,58.4) ; v1(113.9,79.9) v1(115.6,79.9)
+5V: C2.1 C3.2 FB1.2 U1.3
GND: C1.2 C2.2 C3.1 C4.1 C5.2 C6.2 C7.2 C8.1 C9.1 C10.1 C11.1 C12.1 C13.2 C14.1 C15.1 C16.1 C17.1 C18.1 J1.5 J2.5 J3.6 R1.1 R5.1 R6.1 U1.1 U2.8 U2.23 U2.35 U2.47 U2.49 U3.1 U3.9 U3.11 U3.18 U3.25 X1.2 X1.4 | length 48.5
  L1(Signal) w0.2: C16.1 95.087,83.577 95.56,83.577 95.733,83.75 U3.11 ; C17.1 95,85.35 95.6,84.75 U3.9 ; C9.1 99.75,73.03 99.91,73.19 100.19,73.19 100.75,73.75 U2.8 ; U2.35 109.025,76.75 109.215,76.94 C11.1@109.59,76.94
  L1(Signal) w0.25: 102.5,78.75 102.5,77.96 ccw(c102.585,77.96) U2.47 ; 107,70.5 107.025,70.825 U2.23
  L1(Signal) w0.3: v1(99,81.1) 99.775,81.875 U3.18 ; U3.1 99.775,87.175 100.1,87.5 101.3,87.5 v1(102.2,86.6) ; 102.5,78.75 102.63,78.88 C12.1 ; 107,70.5 107,70.255 107.755,69.5 C10.1 ; J1.5 v3(125.1,77)
  L1(Signal) w0.5: v1(93.25,70.5) X1.4 ; v1(93.25,72.5) C5.2 ; v1(94.1,83.49) C16.1 ; v1@94.1,85.4 v1(94.1,85.37) C17.1 ; v1@96.25,76.5 v1(96.25,76.4) C7.2 99.534,76.4 ccw(c99.534,76.741) C8.1 ; v1(97,67.5) X1.2 ; C6.2 97.66,72.51 v1(98.75,72.75) 99.343,72.955 cw(c99.49,72.53) 99.49,72.98 99.74,72.98 C9.1 ; C15.1 v1(99,81.1) ; C18.1 101.91,83.6 v1(102.9,83.6) ; v1(102.6,81) 102.6,80.01 C12.1 ; v1(103.25,82.25) R6.1 ; v1(105,67) 105,68.5 C13.2 ; v1(107.75,68.5) 107.775,68.5 C10.1 ; J3.6 v1(108.7,58.1) ; C11.1 v1(110.75,77.12) ; v1(110,69.5) 110.025,69.5 R5.1 ; v1(110.2,89.5) C14.1 ; J2.5 112.27,86.77 v1(112.3,86.8) ; R1.1 v1(126.2,65.2)
  L4(Signal) w0.5: v1(102.2,86.6) 102.2,86.546 102.9,85.846 v1(102.9,83.6)
  other v1: 122.7,63.4 124,63.4 120.5,63.5 120,67 120,68.25 118.5,69.25 120.75,69.25
  other v2: 102.575,72.3 103.675,72.3 104.775,72.3 105.875,72.3 106.975,72.3 102.575,73.4 103.675,73.4 104.775,73.4 105.875,73.4 106.975,73.4 102.575,74.5 103.675,74.5 104.775,74.5 105.875,74.5 106.975,74.5 102.575,75.6 103.675,75.6 104.775,75.6 105.875,75.6 106.975,75.6 102.575,76.7 103.675,76.7 104.775,76.7 105.875,76.7 106.975,76.7 97.975,83.95 99.075,83.95 97.975,85.05 99.075,85.05
IMU_CPOUT: C18.2 U3.20 | length 1.8
  L1(Signal) w0.2: U3.20 100.525,83.775 101.049,83.775 101.225,83.951 101.225,84.263 101.342,84.38 C18.2
IMU_INT: U2.45 U3.12 | length 17.9
  L1(Signal) w0.2: U3.12 95.85,83.25 95.4,82.8 95.4,80 96.5,78.9 98.6,78.9 99.1,79.4 99.8,79.4 101.4,81 101.8,81 101.8,81.5 102.1,81.8 102.7,81.8 102.9,81.6 103.3,81.6 103.525,81.375 U2.45
IMU_REGOUT: C16.2 U3.10 | length 1.6
  L1(Signal) w0.2: C16.2 U3.10
IMU_SCL: R3.1 U2.42 U3.23 | length 13
  L1(Signal) w0.2: U3.23 103.25,85.25 v1(103.75,84.75) ; U2.42 105.025,79.275 106.25,80.5 106.25,83.375 R3.1 106.125,84.24 105.75,84.615 v1(105.75,84.75)
  L4(Signal) w0.2: v1(103.75,84.75) v1(105.75,84.75)
IMU_SDA: R4.1 U2.43 U3.24 | length 12.1
  L1(Signal) w0.2: U3.24 104.25,85.75 104.925,85.075 R4.1 105,83.425 105,80.75 104.664,80.414 ccw(c104.805,80.273) 104.622,80.353 104.616,80.339 cw(c104.25,80.5) 104.608,80.322 104.546,80.198 ccw(c104.725,80.108) 104.525,80.108 U2.43
LED_PWR_K: D1.1 R1.2 | length 2.3
  L1(Signal) w0.2: D1.1 R1.2
MCU_NRST: C14.2 J2.3 R7.1 U2.7 | length 31.4
  L1(Signal) w0.2: v5(98.75,74) 98.827,74.077 99.077,74.077 99.25,74.25 U2.7 ; C14.2 R7.1 113.5,89.425 v1(113.5,86.8) 113.52,86.78 113.52,85.639 J2.3
  L4(Signal) w0.2: v5(98.75,74) 98.75,77.95 99.9,79.1 105.9,79.1 108,81.2 109.357,81.2 111.97,83.813 111.97,85.35 113.42,86.8 v1(113.5,86.8)
MCU_OSC_IN: C5.1 U2.5 X1.1 | length 13.1
  L1(Signal) w0.2: X1.1 94.925,68.9 95.8,69.775 95.8,71.75 C5.1 95.05,74.55 95.75,75.25 U2.5
MCU_OSC_OUT: R2.2 U2.6 | length 4.1
  L1(Signal) w0.2: R2.2 97.65,74 98.4,74.75 U2.6
MCU_PA4: J3.2 U2.14 | length 18.3
  L1(Signal) w0.2: J3.2 98.7,66.899 102.45,70.649 102.45,70.736 102.525,70.811 U2.14
MCU_PA5: J3.3 U2.15 | length 18.2
  L1(Signal) w0.2: J3.3 101.2,56 100.25,56.95 100.25,67.5 103.025,70.275 U2.15
MCU_PA6: J3.4 U2.16 | length 18.7
  L1(Signal) w0.2: U2.16 103.525,69.775 101.25,67.5 101.25,58.45 103.7,56 J3.4
MCU_PA7: J3.5 U2.17 | length 19.1
  L1(Signal) w0.2: U2.17 104.025,69.275 102.25,67.5 102.25,59.95 106.2,56 J3.5
MCU_SWCLK: J2.4 U2.37 | length 11
  L1(Signal) w0.2: U2.37 107.525,78.775 109,80.25 112.5,80.25 113.54,81.29 J2.4
MCU_SWDIO: J2.2 U2.34 | length 12.8
  L1(Signal) w0.2: U2.34 111.5,76.25 114.75,79.5 114.75,84.289 J2.2
MCU_SWO: J2.6 U2.39 | length 10.6
  L1(Signal) w0.2: U2.39 106.525,78.775 108.75,81 111.75,81 112.25,81.5 112.25,84.329 J2.6
MCU_VCAP1: C13.1 U2.22 | length 2.7
  L1(Signal) w0.25: 106.5,70.25 106.525,70.825 U2.22
  L1(Signal) w0.3: C13.1 106.25,69.679 cw(c106.55,69.679) 106.282,69.813 106.5,70.25
NetD2_1: D2.1 R5.2 | length 1.5
  L1(Signal) w0.2: R5.2 D2.1
NetD2_2: D2.2 U2.26 | length 1.9
  L1(Signal) w0.2: U2.26 D2.2
NetR6_2: R6.2 U2.44 | length 3.6
  L1(Signal) w0.2: U2.44 104.025,78.175 104.001,79.951 cw(c104.201,79.954) 104.022,80.044 104.229,80.458 ccw(c104.05,80.547) 104.25,80.547 104.25,81.175 R6.2
USB_D_N: J1.2 U2.32 | length 16.9
  L1(Signal) w0.26: U2.32 112.35,75.25 113.6,76.5 120.5,76.5 121.95,75.05 J1.2
USB_D_P: J1.3 U2.33 | length 17.2
  L1(Signal) w0.26: U2.33 111.95,75.75 113.5,77.3 120.9,77.3 122.5,75.7 123.813,75.7 123.907,75.607 J1.3
VBUS: C1.1 FB1.1 J1.1
XTAL_IN: C6.1 R2.1 X1.3 | length 3.6
  L1(Signal) w0.2: R2.1 96.863,73.987 96.863,72.512 C6.1 96.85,70.65 X1.3
pads on no net: J1.4 J1.6 J1.7 J1.8 J1.9 J1.10 J1.11 J2. J3.7 J3.8 U2.2 U2.3 U2.4 U2.10 U2.11 U2.12 U2.13 U2.18 U2.19 U2.20 U2.21 U2.25 U2.27 U2.28 U2.29 U2.30 U2.31 U2.38 U2.40 U2.41 U2.46 U3.2 U3.3 U3.4 U3.5 U3.6 U3.7 U3.14 U3.15 U3.16 U3.17 U3.19 U3.21 U3.22

## Polygon pours and split planes (outlines as drawn)
GND on L1(Signal) "VBUS" (solid, pour order 28): 122.45,60.75 124.15,60.75 124.73,61.33 124.73,63.67 124.1,64.3 121.225,64.3 121.225,65.775 120.9,66.1 120.9,68.5 121,68.5 121.5,69 121.5,70.9 121.475,70.9 121.225,71.15 118.125,71.15 117.775,70.8 117.775,68.7 117.4,68.325 117.4,66.5 118.3,65.6 119.7,65.6 119.9,65.4 119.9,63.2 120.8,62.3 121.9,62.3 122.2,62 122.2,61
no net on L1(Signal) "VBUS" (solid, pour order 19): 118.1,59.8 117.9,59.8 117.8,59.9
+3.3V on L1(Signal) "VBUS" (solid, pour order 18): 116.7,57 119.9,57 120,57.1 120,58.967 124.2,58.967 124.2,60.7 119.6,60.7 118.8,61.5 118.8,65 118.6,65.2 117.8,65.2 117.6,65 117.6,61.1 116.5,60 116.5,57.2
+5V on L1(Signal) "VBUS" (solid, pour order 12): 117.7,72.488 116.612,71.4 116,71.4 115.4,70.8 115.4,69.3 115.1,69.3 114.8,69 114.8,65.7 115.3,65.2 115.3,64 115.6,63.7 116.3,63.7 116.7,64.1 116.7,66 117.4,66.7 117.4,69.3 117.4,69.4 117,69.9 116.7,69.9 116.6,70 116.6,70.6 116.925,70.6 117.7,71.375 118.025,71.05 119.35,71.05 119.7,71.4 119.7,74.4 118.5,74.4 117.7,73.6
VBUS on L1(Signal) "VBUS" (solid, pour order 4): 120.475,74.65 119.965,74.367 119.888,71.15 121.45,71.15 121.75,71.356 121.75,73.81 121.988,74.15 124.675,74.15 124.725,74.2 124.725,74.6 124.675,74.65
GND on L2(GND) "VBUS" (solid, pour order 22): 88,91 cw(c89,91) 89,92 126,92 cw(c126,91) 127,91 127,54 cw(c126,54) 126,53 89,53 cw(c89,54) 88,54
GND on L3(GND) "VBUS" (solid, pour order 23): 88,91 cw(c89,91) 89,92 126,92 cw(c126,91) 127,91 127,54 cw(c126,54) 126,53 89,53 cw(c89,54) 88,54

## Silkscreen, mask and mechanical layers (free items; w line width, h text height)
Top Overlay:
  drawing of 11 lines, arcs and shapes, not listed
  text "SWD" at 108.513,79.762 h1.5 r359.83
  text "USB" at 123.3,69.4 h1.52
  text "GPIO" at 99,65.7 h1.52
Mechanical 1:
  the board outline again, w0.2